# Altium PCB PCB.PcbDoc
Units mm, origin at the board's own origin, x right, y up, seen from the top; angles counter-clockwise.
Board outline 63.34 x 44.45 mm, 2 copper layers (Top Layer, Bottom Layer), stack 1.569 mm thick; 16 components, 12 nets, 50 pads, 0 vias.
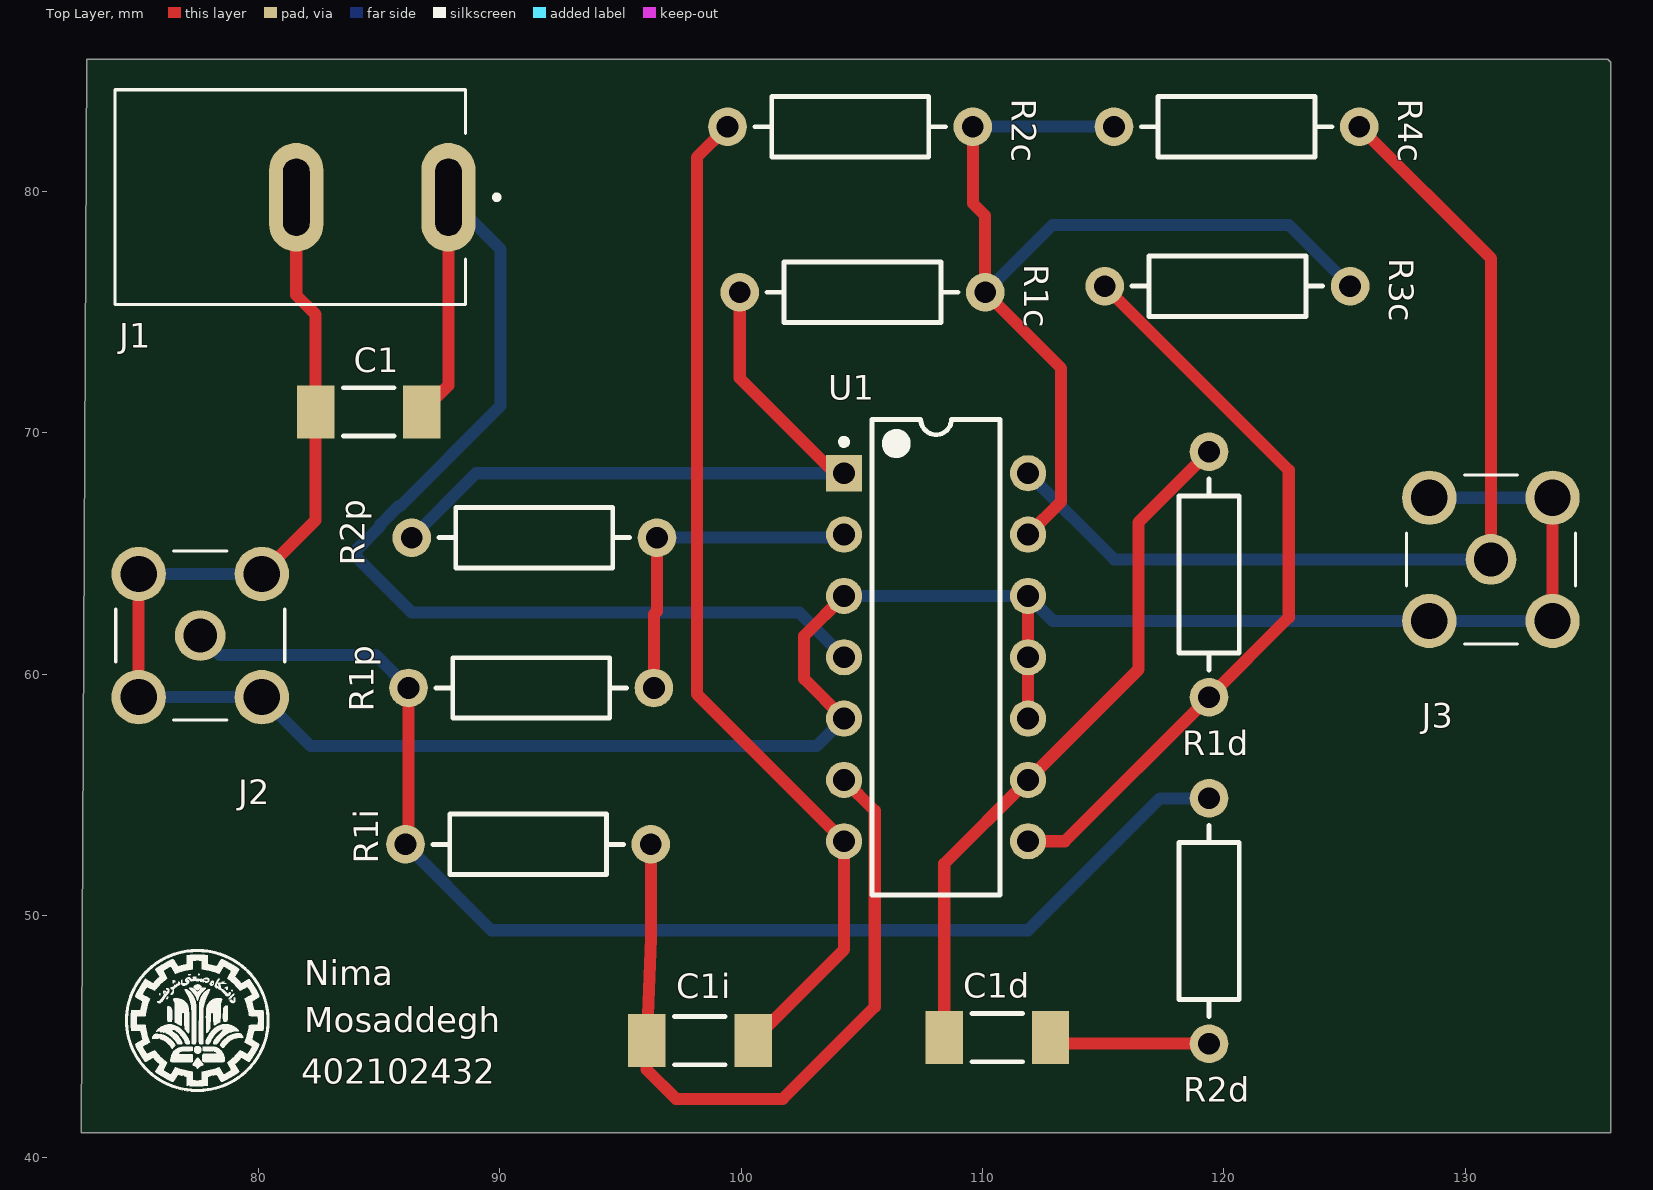
[diagram p0: Top Layer view]
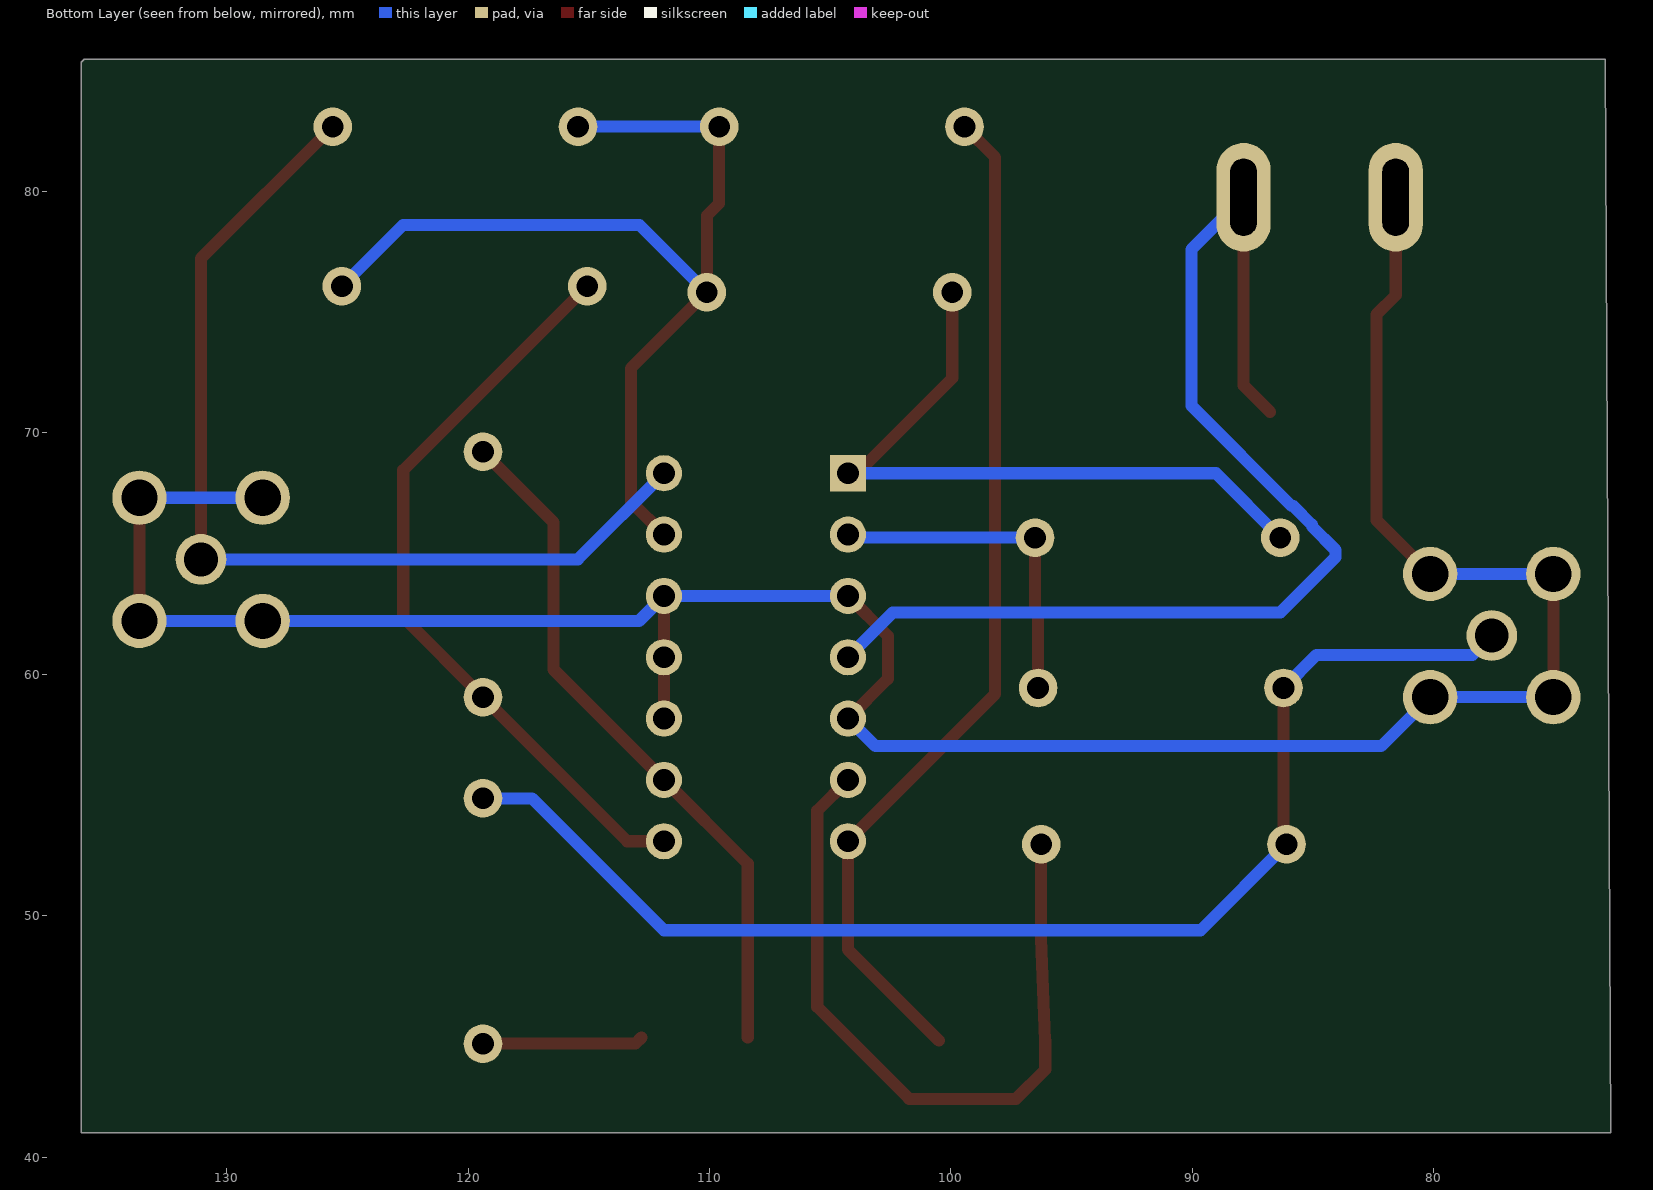
[diagram p1: Bottom Layer view, seen from below]
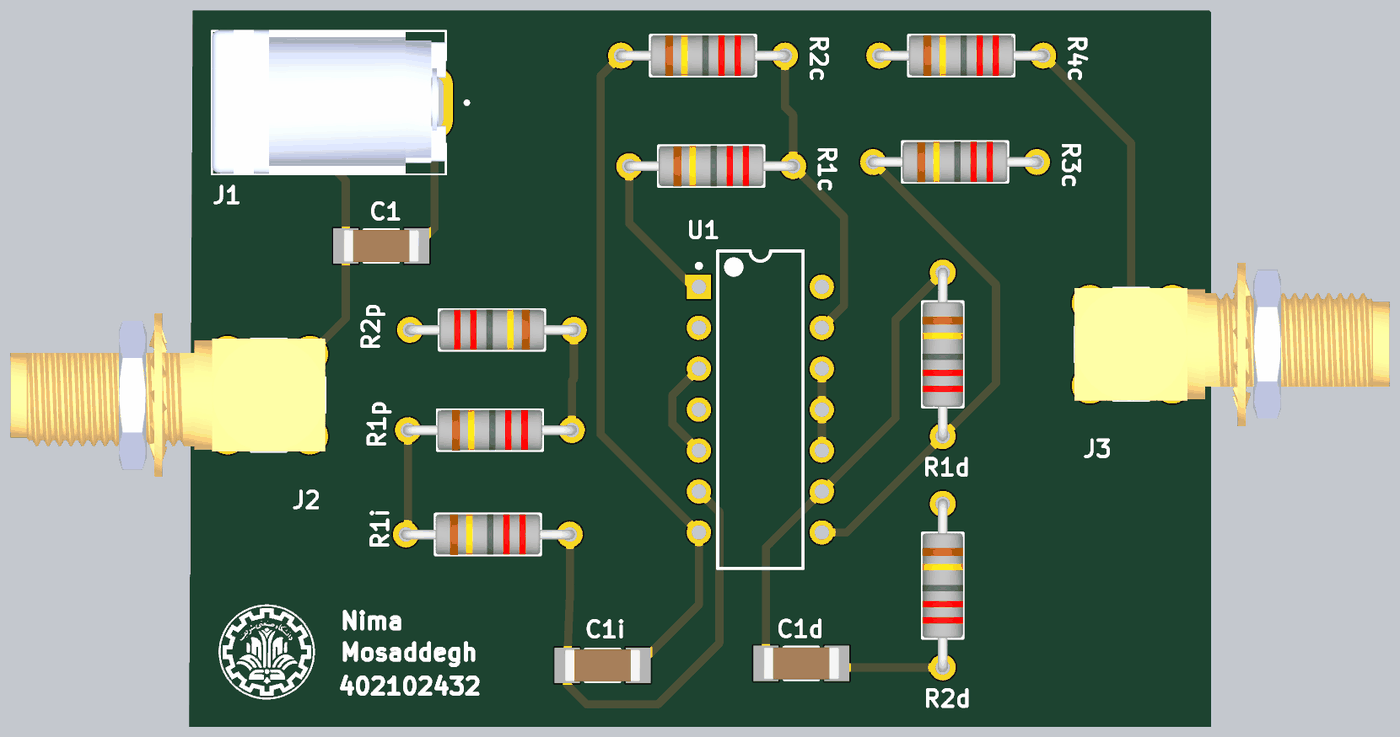
[diagram p2: 3D render of the assembled board from above, using the file's embedded part models]

## Layer stack, top to bottom
Top Solder: solder mask 0.0254, SM-001, Dk 4
Top Layer: signal copper 0.035
Dielectric 1: core 1.4986, Core-043, Dk 4.3
Bottom Layer: signal copper 0.035
Bottom Solder: solder mask 0.0254, SM-001, Dk 4

## Board outline
72.898,85.471 135.89,85.471 136.017,85.344 136.017,41.021 72.678,41.021

## Design rules (kind name [scope] priority, off if disabled: settings)
Clearance [All] p1: gap=0.254 ignorepadtopadclearanceinfootprint=FALSE
PolygonConnect [All] p1: connectstyle=Direct reliefconductorwidth=0.254 reliefentries=4 polygonreliefangle="90 Angle" airgapwidth=0.254
RoutingVias [All] p1: holewidth=0.711 width=1.27 viastyle="Through Hole" minholewidth=0.711 minwidth=1.27 maxholewidth=0.711 maxwidth=1.27
SolderMaskExpansion [All] p1: expansion=0.102 istentingtop=FALSE
SupplyNets "Schematic Supply Nets_1" [InNet('GND')] p1: voltage=0.000
SupplyNets "Schematic Supply Nets" [InNet('VCC')] p2: voltage=0.000
Width [All] p1: maxlimit=0.6 minlimit=0.3 preferedwidth=0.5 minimp=50.000000 maximp=50.000000 favimp=50.000000
30 further rules are at their usual default settings.

## Components (designator, comment, footprint, x,y, rotation, side; value= is the part's Value field where it differs from the comment)
C1 "100nF" CAPC4720X215N 84.582,70.866 r0 top
C1d "1nF" CAPC4720X215N 110.617,44.958 r180 top
C1i "100nF" CAPC4720X215N 98.298,44.831 r0 top
J1 "*" CUI_PJ-037B 87.884,79.756 r180 top
J2 "*" LINX_CONSMA002-L-G 77.607,61.605 r270 top
J3 "*" LINX_CONSMA002-L-G 131.054,64.76 r90 top
R1c "10K" RES1016-650X250 105.029,75.819 r0 top
R1d "10K" RES1016-650X250 119.38,64.135 r270 top
R1i "10K" RES1016-650X250 91.186,52.959 r0 top
R1p "10K" RES1016-650X250 91.313,59.436 r0 top
R2c "10K" RES1016-650X250 104.521,82.677 r0 top
R2d "2K" RES1016-650X250 119.38,49.784 r270 top
R2p "10K" RES1016-650X250 91.44,65.659 r180 top
R3c "10K" RES1016-650X250 120.142,76.073 r0 top
R4c "10K" RES1016-650X250 120.523,82.677 r0 top
U1 "LM324N" N0014A 108.077,60.706 r0 top

## Footprints (in the part's own frame and the unit in brackets; to place one, negate y for a bottom-side part, rotate by r counter-clockwise, add the part's x,y. Pads: shape width x height; smd on the part's side, far side on the other; paste and mask are expansions set on the pad)
CAPC4720X215N [mm] "Capacitor, Non-Polarized, Chip; 4.7mm L X 2mm W X 2.15mm H, IPC Medium Density"
  rect 1.55x2.2 smd: 1(-2.2,0) 2(2.2,0)
  silkscreen extent -1.05,-1 1.05,1, body extent -2.35,-1 2.35,1, height 2.15
CUI_PJ-037B [mm]
  oval 2.25x4.5 hole 1.1 slot 3.2 at 90 deg: 1(0,0) 2(6.3,0)
  silkscreen extent -2.1,-4.45 13.8,4.45, body extent -0.7,-4.51 13.8,4.39, height 10.91
LINX_CONSMA002-L-G [mm]
  round 2.1 hole 1.4: 1(0,0)
  round 2.25 hole 1.5: S1(-2.55,2.55) S2(-2.55,-2.55) S3(2.55,-2.55) S4(2.55,2.55)
  silkscreen extent -3.5,-3.5 3.5,3.5, body extent -5.1,-16 5.1,3.5, height 11.7
N0014A [mm] "DIP, 14-Leads, Body 19.7x6.6mm, Pitch 2.54mm"
  rect 1.5x1.5 hole 0.9: 1(-3.81,7.62)
  round 1.5 hole 0.9: 2(-3.81,5.08) 3(-3.81,2.54) 4(-3.81,0) 5(-3.81,-2.54) 6(-3.81,-5.08) 7(-3.81,-7.62) 8(3.81,-7.62) 9(3.81,-5.08) 10(3.81,-2.54) 11(3.81,0) 12(3.81,2.54) 13(3.81,5.08) 14(3.81,7.62)
  silkscreen extent -3.93,-9.85 2.65,9.85, body extent -3.95,-9.85 3.95,9.85, height 5.08
RES1016-650X250 [mm] "Resistor, Axial, Pad spacing 10.16 mm - Body Lengh 6.5mm X Body Diameter 2.5mm"
  round 1.6 hole 0.9: 1(-5.08,0) 2(5.08,0)
  silkscreen extent -3.95,-1.25 3.95,1.25, body extent -5.38,-1.27 5.38,1.26, height 2.51

## Part data
C1 C1d C1i: library part Capacitor, "Non-polarised capacitor"
J1: library part "DC Power Jack Connector", "2.5 x 6.5 mm, 2.5 A, Horizontal, Through Hole, Dc Power Jack Connector"
J2 J3: library part Coax_1Female_1Shield, "SMA Jack 50 Ohm PCB Through Hole"
R1c R1d R1i R1p R2c R2d R2p R3c R4c: library part Resistor, "Resistor"
U1: "Low Power Quad Operational Amplifier, 14-pin MDIP", Manufacturer="Texas Instruments", ComponentLink1Description="Datasheet URL", ComponentLink1URL=http://www.ti.com/general/docs/lit/getliterature.tsp?genericPartNumber=LM324&fileType=pdf

## Nets (pads, with @x,y where several pads share a name; then routed paths per layer and width w, separated by ;. In a path a pad name is that pad's centre, name@x,y a point inside that pad or via, vN(x,y) a via of type N, cw(c..) or ccw(c..) an arc to the next point about the centre after c; other vN are vias at no path point)
GND: C1.1 J1.2 J2.S1 J2.S2 J2.S3 J2.S4 J3.S1 J3.S2 J3.S3 J3.S4 U1.3 U1.5 U1.10 U1.11 U1.12 | length 109.1
  Top Layer w0.5: J2.S3 J2.S2 ; J2.S1 82.382,66.38 C1.1 82.382,74.905 81.584,75.703 J1.2 ; U1.5 102.616,59.817 102.616,61.595 U1.3 ; U1.10 U1.11 U1.12 ; J3.S2 J3.S3
  Bottom Layer w0.5: J2.S3 J2.S4 82.189,57.023 95.555,57.023 103.124,57.023 U1.5 ; J2.S2 J2.S1 ; U1.3 U1.12 112.923,62.21 J3.S1 J3.S2 ; J3.S4 J3.S3
Input: J2.1 R1i.1 R1p.1 R2d.1 | length 53.1
  Top Layer w0.5: R1i.1 86.233,53.086 R1p.1
  Bottom Layer w0.5: J2.1 78.404,60.808 84.861,60.808 R1p.1 ; R1i.1 89.662,49.403 101.981,49.403 111.887,49.403 117.348,54.864 R2d.1
NetC1d_1: C1d.1 R2d.2 | length 6.7
  Top Layer w0.5: C1d.1 113.071,44.704 116.205,44.704 R2d.2
NetC1d_2: C1d.2 R1d.1 U1.9 | length 28.8
  Top Layer w0.5: C1d.2 108.417,52.156 U1.9 116.459,60.198 116.459,66.294 R1d.1
NetC1i_1: C1i.1 R1i.2 U1.6 | length 30.8
  Top Layer w0.5: R1i.2 96.266,49.063 C1i.1 96.098,43.627 97.307,42.418 101.727,42.418 105.537,46.228 105.537,54.356 U1.6
NetC1i_2: C1i.2 R2c.1 U1.7 | length 42.5
  Top Layer w0.5: R2c.1 98.171,81.407 98.171,59.182 U1.7 104.267,48.6 C1i.2
NetR1c_1: R1c.1 R2p.2 U1.1 | length 28.5
  Top Layer w0.5: R1c.1 99.949,72.263 103.886,68.326 U1.1
  Bottom Layer w0.5: R2p.2 89.027,68.326 U1.1
NetR1c_2: R1c.2 R2c.2 R3c.2 R4c.1 U1.13 | length 42.1
  Top Layer w0.5: R2c.2 109.601,79.502 110.109,78.994 R1c.2 113.259,72.669 113.259,67.158 U1.13
  Bottom Layer w0.5: R2c.2 R4c.1 ; R1c.2 112.903,78.613 122.682,78.613 R3c.2
NetR1d_2: R1d.2 R3c.1 U1.8 | length 31.5
  Top Layer w0.5: U1.8 113.411,53.086 R1d.2 122.682,62.357 122.682,68.453 R3c.1
NetR1p_2: R1p.2 R2p.1 U1.2 | length 14.1
  Top Layer w0.5: R1p.2 96.393,62.484 96.52,62.611 R2p.1
  Bottom Layer w0.5: R2p.1 100.33,65.659 104.14,65.659 U1.2
Output: J3.1 R4c.2 U1.14 | length 40.8
  Top Layer w0.5: R4c.2 131.054,77.226 J3.1
  Bottom Layer w0.5: U1.14 115.453,64.76 J3.1
VCC: C1.2 J1.1 U1.4 | length 49.6
  Top Layer w0.5: C1.2 87.884,71.968 J1.1
  Bottom Layer w0.5: J1.1 90.043,77.597 90.043,71.12 85.886,66.963 85.82,66.963 85.056,66.199 85.056,66.133 84.074,65.151 84.074,64.846 86.36,62.56 102.413,62.56 U1.4

## Silkscreen, mask and mechanical layers (free items; w line width, h text height)
Top Overlay:
  drawing of 33 lines, arcs and shapes, not listed
  text "Nima" at 81.915,47.117 h1.02
  text "Mosaddegh" at 81.915,45.172 h1.02
  text "402102432" at 81.788,43.053 h1.02